# Altium PCB JoyStick_PCB.PcbDoc
Units mm, origin at the board's own origin, x right, y up, seen from the top; angles counter-clockwise.
Board outline 30 x 60.9 mm, 2 copper layers (Top Layer, Bottom Layer), stack 1.571 mm thick; 16 components, 13 nets, 68 pads, 5 vias.
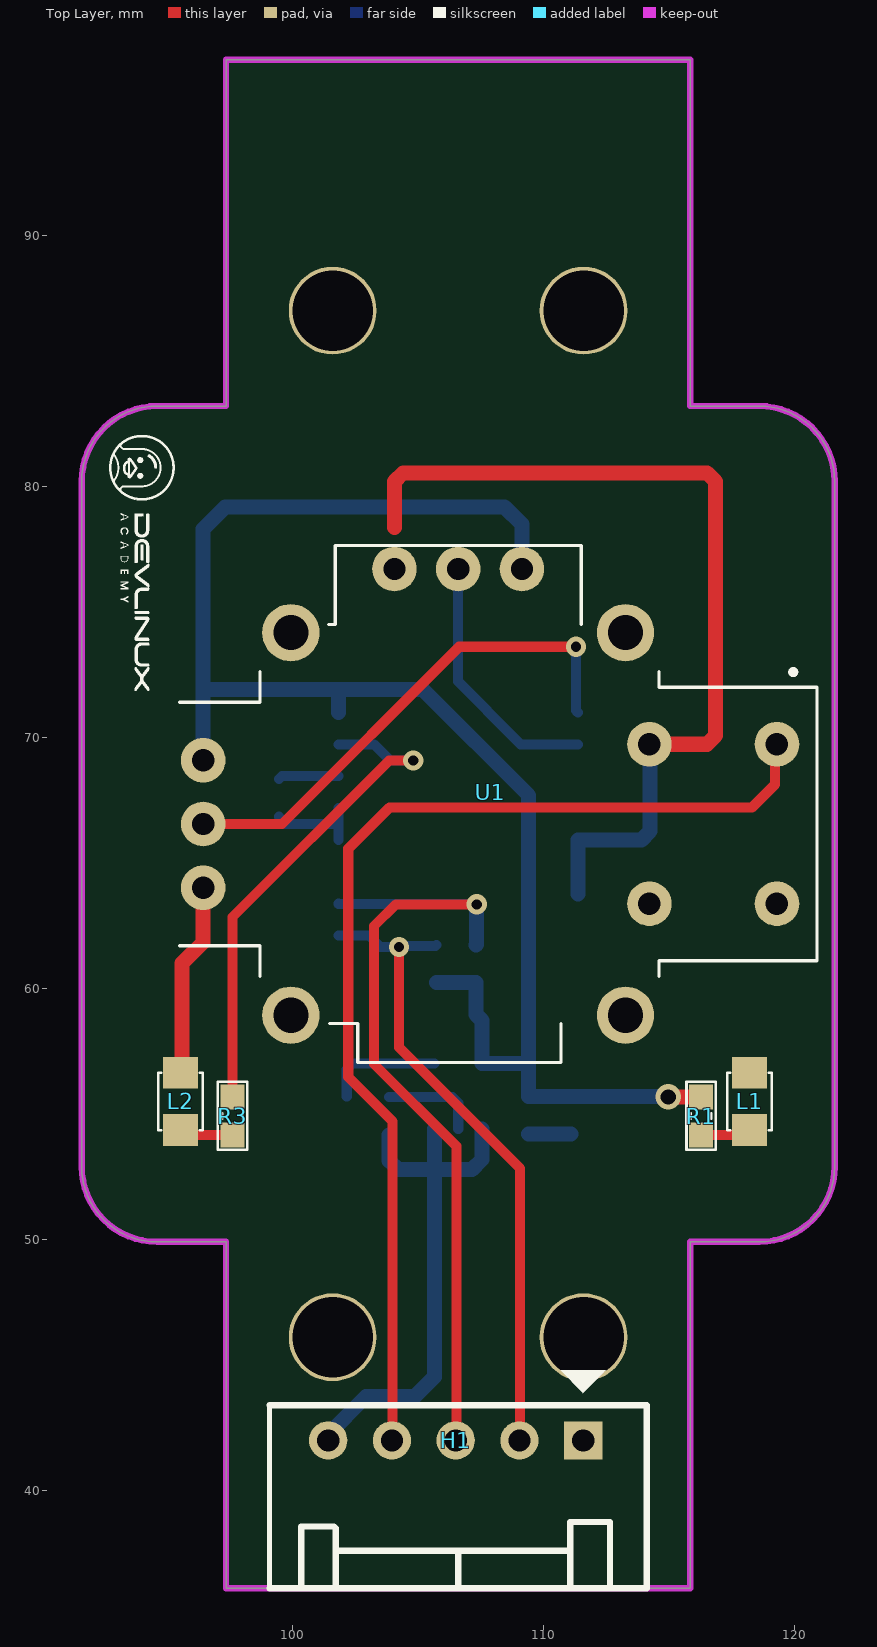
[diagram p0: Top Layer view]
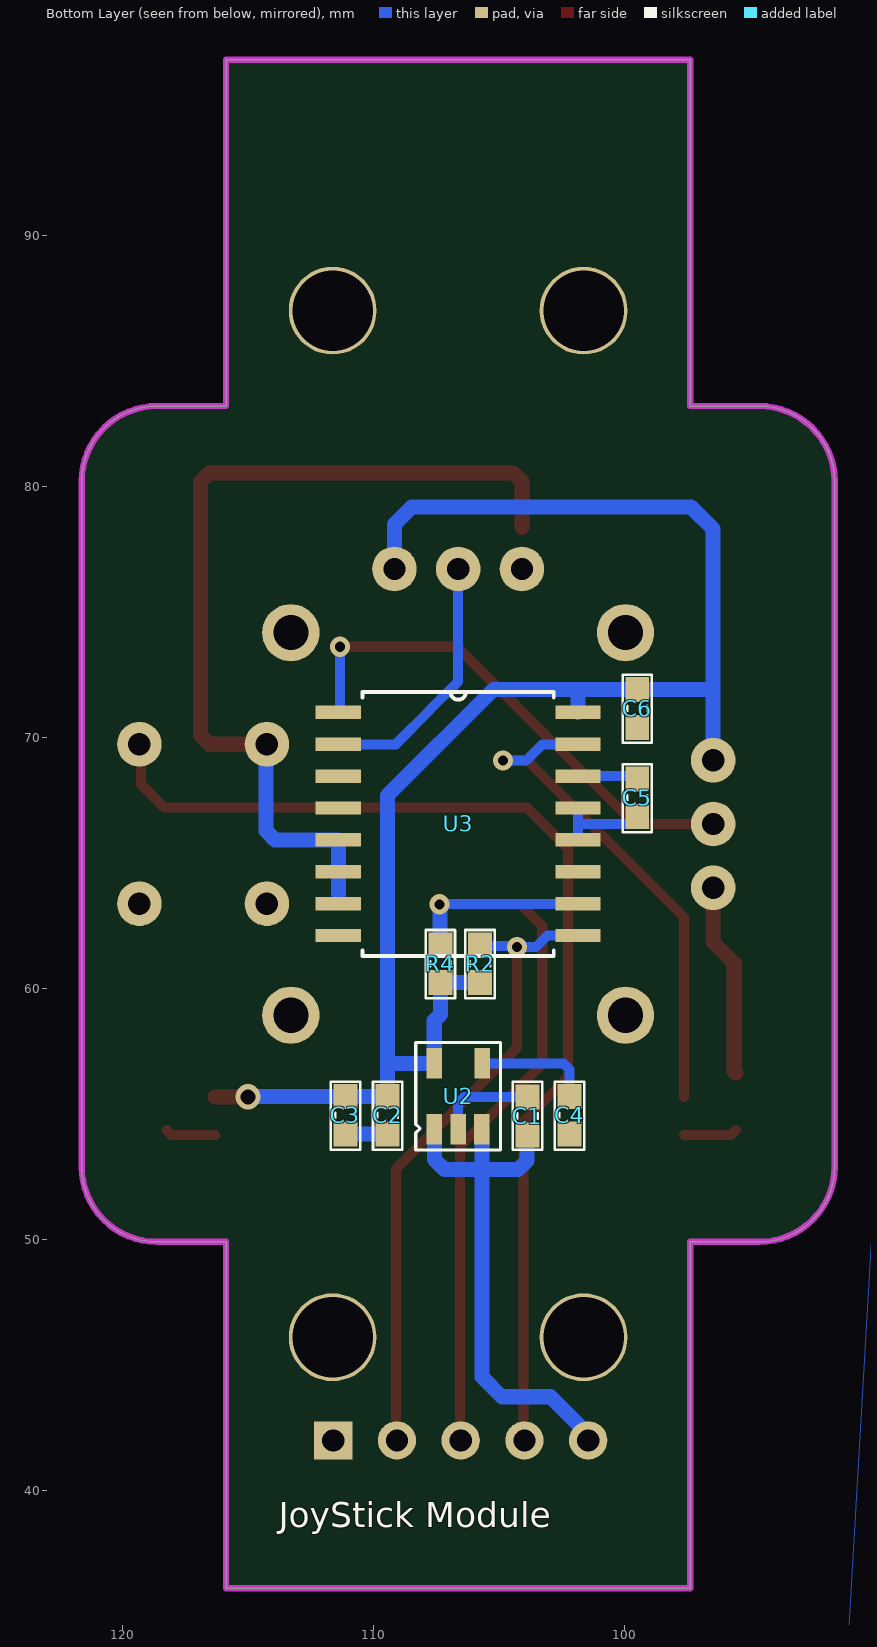
[diagram p1: Bottom Layer view, seen from below]
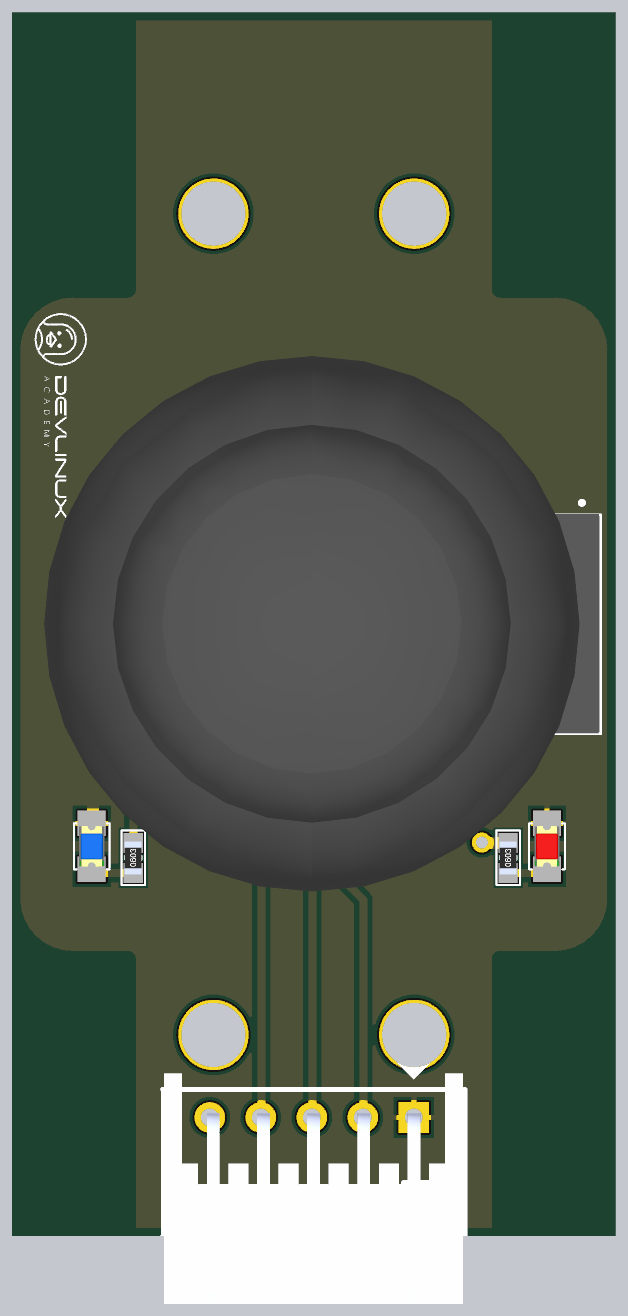
[diagram p2: 3D render of the assembled board from above, using the file's embedded part models]
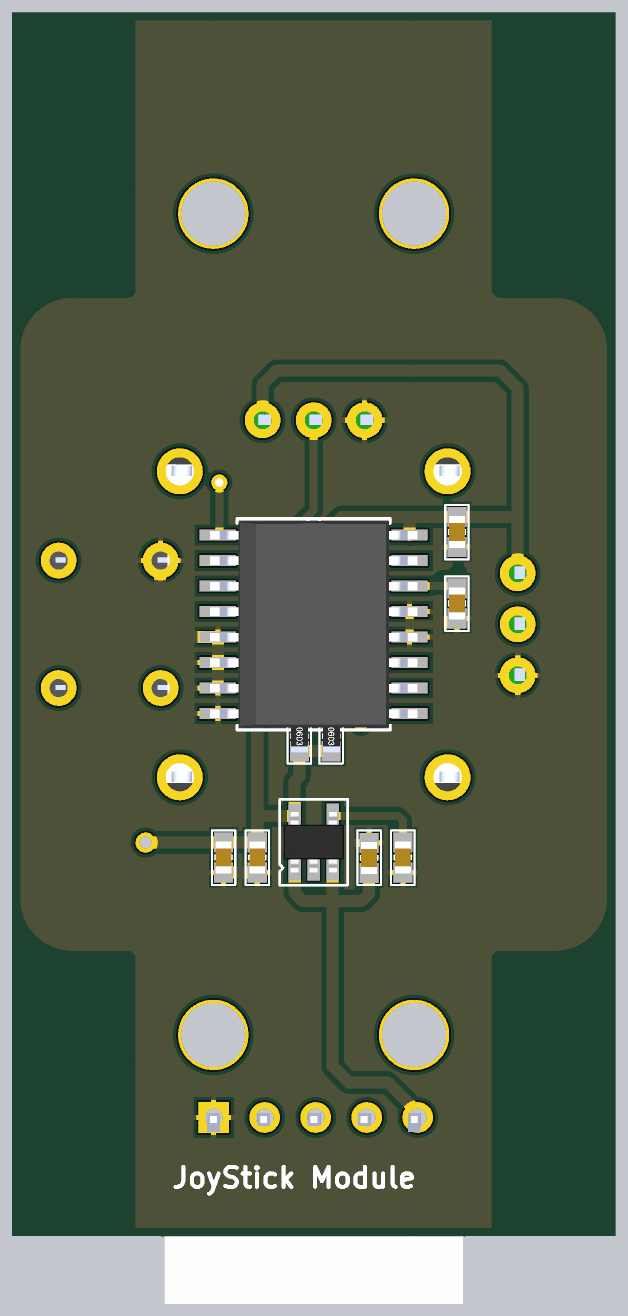
[diagram p3: 3D render of the assembled board from below, using the file's embedded part models]

## Layer stack, top to bottom
Top Solder: solder mask 0.0102, Solder Resist, Dk 3.5
Top Layer: signal copper 0.0356
Dielectric 1: dielectric 1.5, FR-4, Dk 4.8
Bottom Layer: signal copper 0.0356
Bottom Solder: solder mask 0.0102, Solder Resist, Dk 3.5

## Board outline
97.37,36.1 97.37,49.9 94.62,49.9 cw(c94.62,52.9) 91.62,52.9 91.62,80.2 cw(c94.62,80.2) 94.62,83.2 97.37,83.2 97.37,97 115.87,97 115.87,83.2 118.62,83.2 cw(c118.62,80.2) 121.62,80.2 121.62,52.9 cw(c118.62,52.9) 118.62,49.9 115.87,49.9 115.87,36.1

## Design rules (kind name [scope] priority, off if disabled: settings)
Clearance [All] p1: gap=0.254 ignorepadtopadclearanceinfootprint=FALSE except(0: Arc-Hole Track-Hole SMDPad-Hole THPad-Hole Via-Hole Fill-Hole Poly-Hole Region-Hole Text-Hole)
PolygonConnect [All] p1: connectstyle=Relief reliefconductorwidth=0.254 reliefentries=4 polygonreliefangle="90 Angle" airgapwidth=0.254
RoomDefinition JoyStick_SCH [InComponentClass('JoyStick_SCH')] p1: confinementstyle=ConfineIn formatcopy=TRUE lockcomponents=FALSE outline 178.943,26.797 223.139,26.797 223.139,57.912 178.943,57.912
RoutingVias [All] p1: holewidth=0.4 width=0.8 viastyle="Through Hole" minholewidth=0.3 minwidth=0.6 maxholewidth=0.5 maxwidth=1
SolderMaskExpansion [All] p1: expansion=0.102 istentingtop=FALSE
Width [All] p1: maxlimit=0.6 minlimit=0.254 preferedwidth=0.4
30 further rules are at their usual default settings.

## Components (designator, comment, footprint, x,y, rotation, side; value= is the part's Value field where it differs from the comment)
C1 "100nF" "tu 0603" 103.86,54.915 r90 bottom
C2 "10uF" "tu 0603" 109.43,54.94 r270 bottom
C3 "100nF" "tu 0603" 111.11,54.94 r270 bottom
C4 "22nF" "tu 0603" 102.18,54.94 r270 bottom
C5 "100nF" "tu 0603" 99.485,67.59 r270 bottom
C6 "100nF" "tu 0603" 99.485,71.15 r270 bottom
H1 "5P 2.54" "Header 5P DC 2.54" 111.6,41.99 r270 top
L1 "LED 0805" LED-0805-Red 118.23,54.35 r90 top
L2 "LED 0805" LED-0805-Blue 95.56,54.35 r90 top
R1 "1k" "tro smd 0603" 116.3,54.915 r90 top
R2 "10k" "tro smd 0603" 105.75,60.98 r270 bottom
R3 "1k" "tro smd 0603" 97.63,54.915 r90 top
R4 "10k" "tro smd 0603" 107.33,60.98 r270 bottom
U1 "JoyStick_COM-09032" XDCR_COM-09032 106.62,66.55 r270 top
U2 "RT9193-33GB" SOT23-5 106.62,55.7 r180 bottom
U3 "PCF8591T/2,512" SOIC127P1032X265-16N 106.62,66.55 r180 bottom

## Footprints (in the part's own frame and the unit in brackets; to place one, negate y for a bottom-side part, rotate by r counter-clockwise, add the part's x,y. Pads: shape width x height; smd on the part's side, far side on the other; paste and mask are expansions set on the pad)
"Header 5P DC 2.54" [mil]
  rect 60x60 hole 35: 1(0,0)
  round 60 hole 35: 2(0,-100) 3(0,-200) 4(0,-300) 5(0,-400)
  silkscreen extent -110,-492 232,100, body extent -87,-490 366,97, height 240
LED-0805-Blue [mil]
  rect 50x55 smd: 1(0,0) 2(90,0)
  silkscreen extent 0,-35 90,35, body extent 5,-25 85,25, height 43
LED-0805-Red [mil]
  rect 50x55 smd: 1(0,0) 2(90,0)
  silkscreen extent 0,-35 90,35, body extent 5,-25 85,25, height 43
SOIC127P1032X265-16N [mil]
  rect 71x21 smd: 1(-188,175) 2(-188,125) 3(-188,75) 4(-188,25) 5(-188,-25) 6(-188,-75) 7(-188,-125) 8(-188,-175) 9(188,-175) 10(188,-125) 11(188,-75) 12(188,-25) 13(188,25) 14(188,75) 15(188,125) 16(188,175)
  silkscreen extent -150,-207 150,207, body extent -203,-203 203,203, height 104
SOT23-5 [mm] "CASE: SOT"
  rect 0.62x1.22 smd mask+0.076: 1(-0.953,-1.31) 2(-0.003,-1.31) 3(0.947,-1.31) 4(0.952,1.31) 5(-0.953,1.31)
  silkscreen extent -1.69,-2.14 1.69,2.14, body extent -1.5,-1.5 1.5,1.5, height 1.41
"tro smd 0603" [mm] "Chip Capacitor, 2-Leads, Body 1,60x0,80mm, IPC Medium Density"
  rect 1x0.95 smd mask+0.076: 1(-0.75,0) 2(0.75,0)
  silkscreen extent -1.35,-0.58 1.37,0.58, body extent -0.82,-0.42 0.82,0.43, height 0.44
"tu 0603" [mm] "Chip Capacitor, 2-Leads, Body 1,60x0,80mm, IPC Medium Density"
  rect 1x0.95 smd mask+0.076: 1(-0.75,0) 2(0.75,0)
  silkscreen extent -1.35,-0.58 1.37,0.58, body extent -0.8,-0.4 0.8,0.4, height 0.9
XDCR_COM-09032 [mil]
  round 70 hole 35.43: B1A(-125,500) B1B(125,500) B2A(-125,300) B2B(125,300)
  round 70 hole 35: H1(-100,-400) H2(0,-400) H3(100,-400) V1(-400,100) V2(-400,0) V3(-400,-100)
  round 90 hole 55: S1(-300,262.5) S2(-300,-262.5) S3(300,-262.5) S4(300,262.5)
  silkscreen extent -437,-437 374,563, body extent -526,-529 524,559, height 1190

## Part data
C1 C3 C4 C5 C6: library part "Tu 0603 104 50V 10%", "Dán", Chung_Loai=Dán, Don_Vi=Con, Ma_Hang=MH004568, So_Chan=2, Ten_Linh_Kien="Tụ 0603 104-100nF 10% 50V"
C2: library part "Tu 0603 106 16V 20%", "Dán", Chung_Loai=Dán, Don_Vi=Con, Ma_Hang=MH004848, So_Chan=2, Ten_Linh_Kien="Tụ 0603-10uF 20% 16V"
H1: library part "Header 5P 2.54 Duc Cong", "Cắm", Chung_Loai=Cắm, Don_Vi=Con, Ma_Hang=MH001308, Ten_Linh_Kien="Header 5P XH2.54-5P Đực Cong"
L1: library part "LED 0805 Do", "Dán", Chung_Loai=Dán, Don_Vi=Con, Ma_Hang=MH000897, Ten_Linh_Kien="LED 0805 Màu Đỏ (Red)"
L2: library part "LED 0805 Xanh Duong", "Dán", Chung_Loai=Dán, Don_Vi=Con, Ma_Hang=MH002327, Ten_Linh_Kien="LED 0805 Màu Xanh Dương (Blue)"
R1 R3: library part "Tro 0603 1% 1k", "Dán", Chung_Loai=Dán, Don_Vi=Con, Ma_Hang=MH006334, So_Chan=2, Ten_Linh_Kien="Trở 0603 1% 1k"
R2 R4: library part "Tro 0603 1% 10k", "Dán", Chung_Loai=Dán, Don_Vi=Con, Ma_Hang=MH006333, So_Chan=2, Ten_Linh_Kien="Trở 0603 1% 10k"
U1: "Thumb Joystick", Package=None, Availability=Unavailable, MP=COM-09032, Price=None
U2: library part REG_5.5V-3.3V-0.3A-1W-SOT-23-5, "Linear Voltage Regulator IC 1 Output 300mA SOT-23-5", Alternate Part Number-1=NA, Case/Package=SOT-23-5, Manufacturer="Richtek USA Inc.", Supplier Part Number-1=C15651, Manufacturer Part Number=RT9193-33GB, Supplier-1=LCSC
U3: "ADC, DAC 8 b 11.1k I2C, Serial 16-SO", Package="SOIC-16 NXP Semiconductors", Check_prices=https://www.snapeda.com/parts/PCF8591T/2,512/NXP+Semiconductors/view-part/?ref=eda, MF="NXP USA", MP=PCF8591T/2,512, SnapEDA_Link=https://www.snapeda.com/parts/PCF8591T/2,512/NXP+Semiconductors/view-part/?ref=snap

## Free pads (board coordinates)
  round 3.5 hole 3.2: 9(101.62,46.1) 9(101.62,87) 9(111.62,46.1) 9(111.62,87)

## Via types
v1: diameter 0.8, hole 0.4, Top Layer to Bottom Layer, 4 vias
v2: diameter 1, hole 0.6, Top Layer to Bottom Layer, 1 vias

## Nets (pads, with @x,y where several pads share a name; then routed paths per layer and width w, separated by ;. In a path a pad name is that pad's centre, name@x,y a point inside that pad or via, vN(x,y) a via of type N, cw(c..) or ccw(c..) an arc to the next point about the centre after c; other vN are vias at no path point)
+3V3: C2.1 C3.1 C6.1 R1.2 R2.2 R4.2 U1.H1 U1.V1 U2.5 U3.16 | length 65.6
  Top Layer w0.6: v2(114.99,55.68) 115.005,55.665 R1.2
  Bottom Layer w0.6: U1.H1 96.46,71.88 ; U3.16 101.845,71.9 ; R2.2 R4.2 107.33,58.96 107.573,58.717 U2.5 109.43,57.01 ; U1.V1 109.16,78.49 108.47,79.18 97.34,79.18 96.46,78.3 96.46,72.66 96.46,71.88 ; v2(114.99,55.68) 114.985,55.685 111.115,55.685 C3.1 C2.1 109.43,57.01 ; 96.46,71.88 96.48,71.9 C6.1 101.845,71.9 ; 101.845,71.9 105.22,71.9 109.43,67.69 109.43,57.01
+5: C1.1 H1.5 U2.1 U2.3 | length 21.5
  Bottom Layer w0.6: H1.5 101.44,42.23 102.94,43.73 104.88,43.73 105.673,44.523 105.673,52.78 ; C1.1 103.875,54.15 103.875,53.131 104.226,52.78 105.673,52.78 ; U2.3 105.673,52.78 ; U2.1 107.563,54.38 107.563,53.174 107.169,52.78 105.673,52.78
GND: C1.2 C2.2 C3.2 C4.2 C5.2 C6.2 H1.1 L1.2 L2.2 U1.B2A U1.H3 U1.V3 U2.2 U3.5 U3.6 U3.7 U3.8 U3.12 U3.13 | length 53.6
  Top Layer w0.6: L2.2 95.62,56.696 95.62,61 96.46,61.84 U1.H3 ; 104.08,78.36 104.08,80.189 104.431,80.54 116.529,80.54 116.88,80.189 116.88,70.076 116.529,69.725 U1.B2A
  Bottom Layer w0.4: C5.2 99.485,66.825 99.76,66.55 101.845,66.55 ; U3.12 101.845,66.55 ; U3.13 101.845,66.55 ; C1.2 106.388,55.665 106.623,55.43 U2.2
  Bottom Layer w0.6: C2.2 C3.2 ; 111.395,63.755 U3.6 U3.5 113.919,65.915 114.27,66.266 114.27,69.695 U1.B2A
NetC4_1: C4.1 U2.4 | length 4.7
  Bottom Layer w0.4: C4.1 102.18,56.776 102.414,57.01 U2.4
NetC5_1: C5.1 U3.14 | length 2.4
  Bottom Layer w0.4: C5.1 99.6,68.455 U3.14
NetL1_1: L1.1 R1.1 | length 2
  Top Layer w0.4: R1.1 118.045,54.165 L1.1
NetL2_1: L2.1 R3.1 | length 2.1
  Top Layer w0.4: L2.1 95.745,54.165 R3.1
NetR3_2: R3.2 U3.15 | length 20.2
  Top Layer w0.4: R3.2 97.63,62.84 103.87,69.08 v1(104.83,69.08)
  Bottom Layer w0.4: U3.15 103.265,69.725 103.91,69.08 v1(104.83,69.08)
SCL: H1.3 R4.1 U3.10 | length 33.5
  Top Layer w0.4: H1.3 106.55,42.02 106.55,53.71 103.27,56.99 103.27,62.48 104.14,63.35 v1(107.36,63.35)
  Bottom Layer w0.4: U3.10 101.857,63.363 107.347,63.363 v1(107.36,63.35)
  Bottom Layer w0.6: R4.1 107.345,61.745 107.345,63.335 v1(107.36,63.35)
SDA: H1.2 R2.1 U3.9 | length 25.8
  Top Layer w0.4: v1(104.27,61.65) 104.27,57.64 109.09,52.82 109.09,42.02 H1.2
  Bottom Layer w0.4: U3.9 103.065,62.105 103.52,61.65 v1(104.27,61.65) 104.31,61.69 105.71,61.69 R2.1
SW: H1.4 U1.B1A | length 44
  Top Layer w0.4: H1.4 104.01,42.02 104.01,54.7 102.24,56.47 102.24,65.565 103.875,67.2 118.32,67.2 119.25,68.13 119.25,69.32 119.32,69.39 U1.B1A
VRX: U1.H2 U3.1 | length 20.5
  Top Layer w0.4: U1.H2 99.6,66.55 106.66,73.61 v1(111.32,73.61)
  Bottom Layer w0.4: U3.1 111.387,70.995 111.32,71.062 v1(111.32,73.61) v1@111.395,73.535
VRY: U1.V2 U3.2 | length 10.3
  Bottom Layer w0.4: U1.V2 106.62,72.23 107.76,71.09 107.76,71.07 109.105,69.725 U3.2
pads on no net: U1.B1B U1.B2B U1.S1 U1.S2 U1.S3 U1.S4 U3.3 U3.4 U3.11

## Polygon pours and split planes (outlines as drawn)
GND on Top Layer "NONET_L01_P000" (solid, remove dead copper, shelved, pour order 0): 86.09,100.19 123.75,100.19 125.6,98.34 125.6,32.15 90.41,32.15 89.42,31.16
GND on Bottom Layer "NONET_L02_P001" (solid, remove dead copper, shelved, pour order 1): 87.2,100.8 87.57,100.43 123.62,100.43 123.62,32.52 91.15,32.52

## Keep-outs
Keep-Out Layer:
  lines w0.254: 91.62,52.9 ccw(c94.62,52.9) 94.62,49.9 97.37,49.9 97.37,36.1 115.87,36.1 115.87,49.9 118.62,49.9 ccw(c118.62,52.9) 121.62,52.9 121.62,80.2 ccw(c118.62,80.2) 118.62,83.2 115.87,83.2 115.87,97 106.62,97 97.37,97 97.37,83.2 94.62,83.2 ccw(c94.62,80.2) 91.62,80.2 91.62,52.9

## Silkscreen, mask and mechanical layers (free items; w line width, h text height)
Top Overlay:
  drawing of 21 lines, arcs and shapes, not listed
Bottom Overlay:
  text "JoyStick Module" at 113.77,38.523 h1